# Altium PCB PCI_ASTROPIX_carrier.PcbDoc
Units mm, origin at the board's own origin, x right, y up, seen from the top; angles counter-clockwise.
Board outline 51.3 x 50.35 mm, 4 copper layers (Top Layer, HV_vss, vdd_gnd, Bottom Layer); 36 components, 76 nets, 434 pads, 16 vias.
Unrouted connection lines stored in the file: 94.
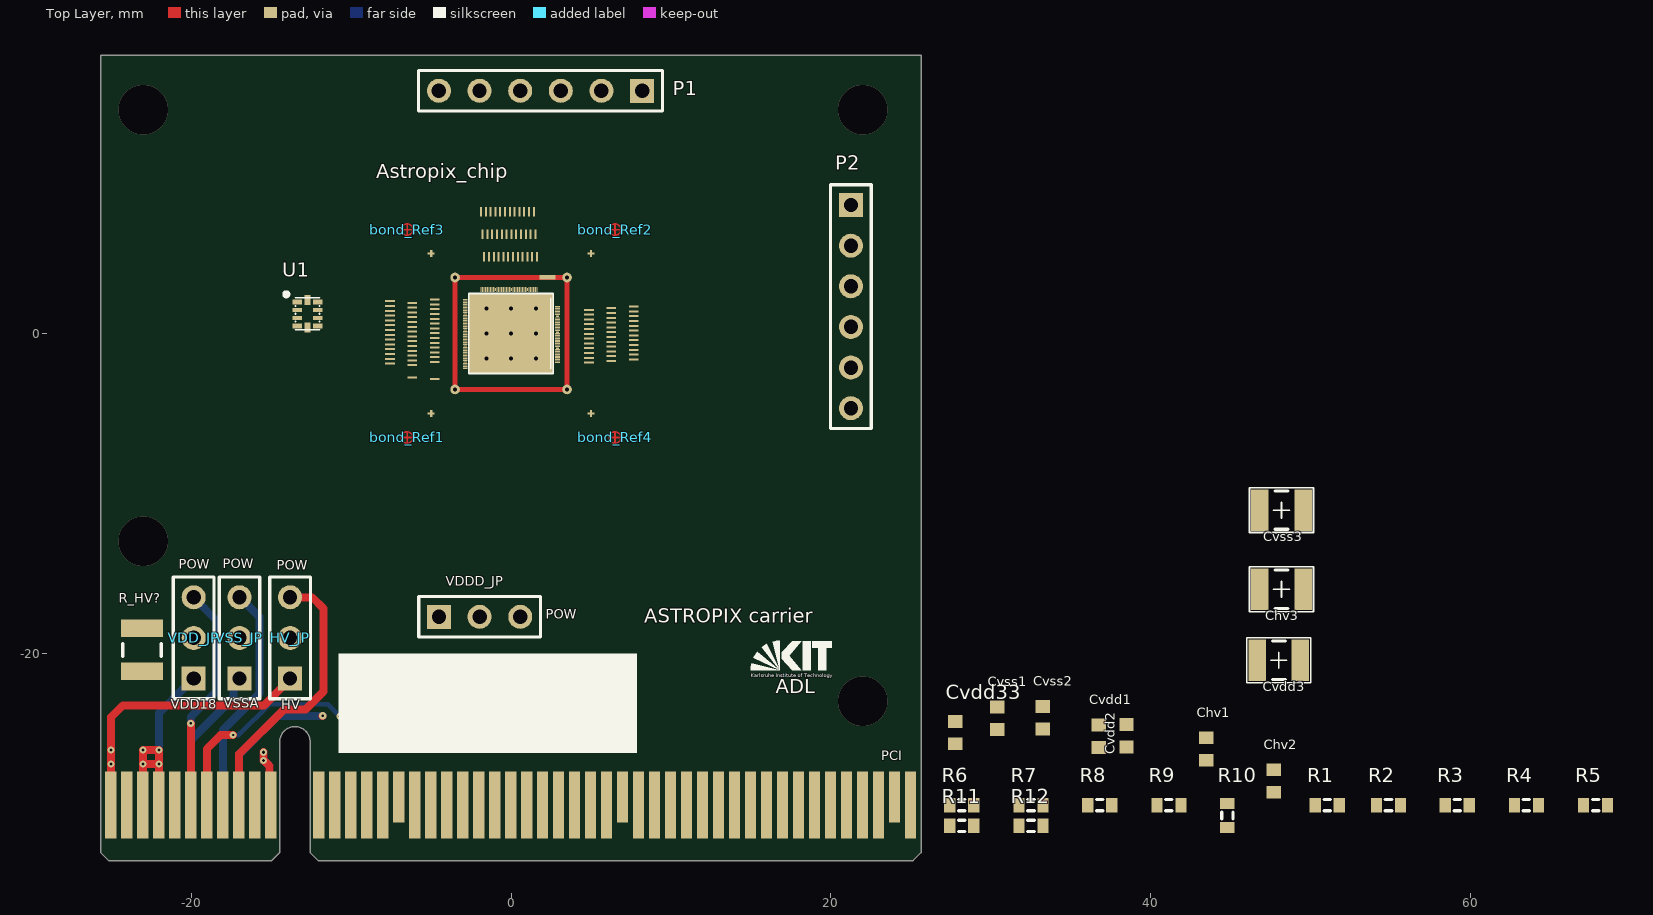
[diagram p0: Top Layer view]
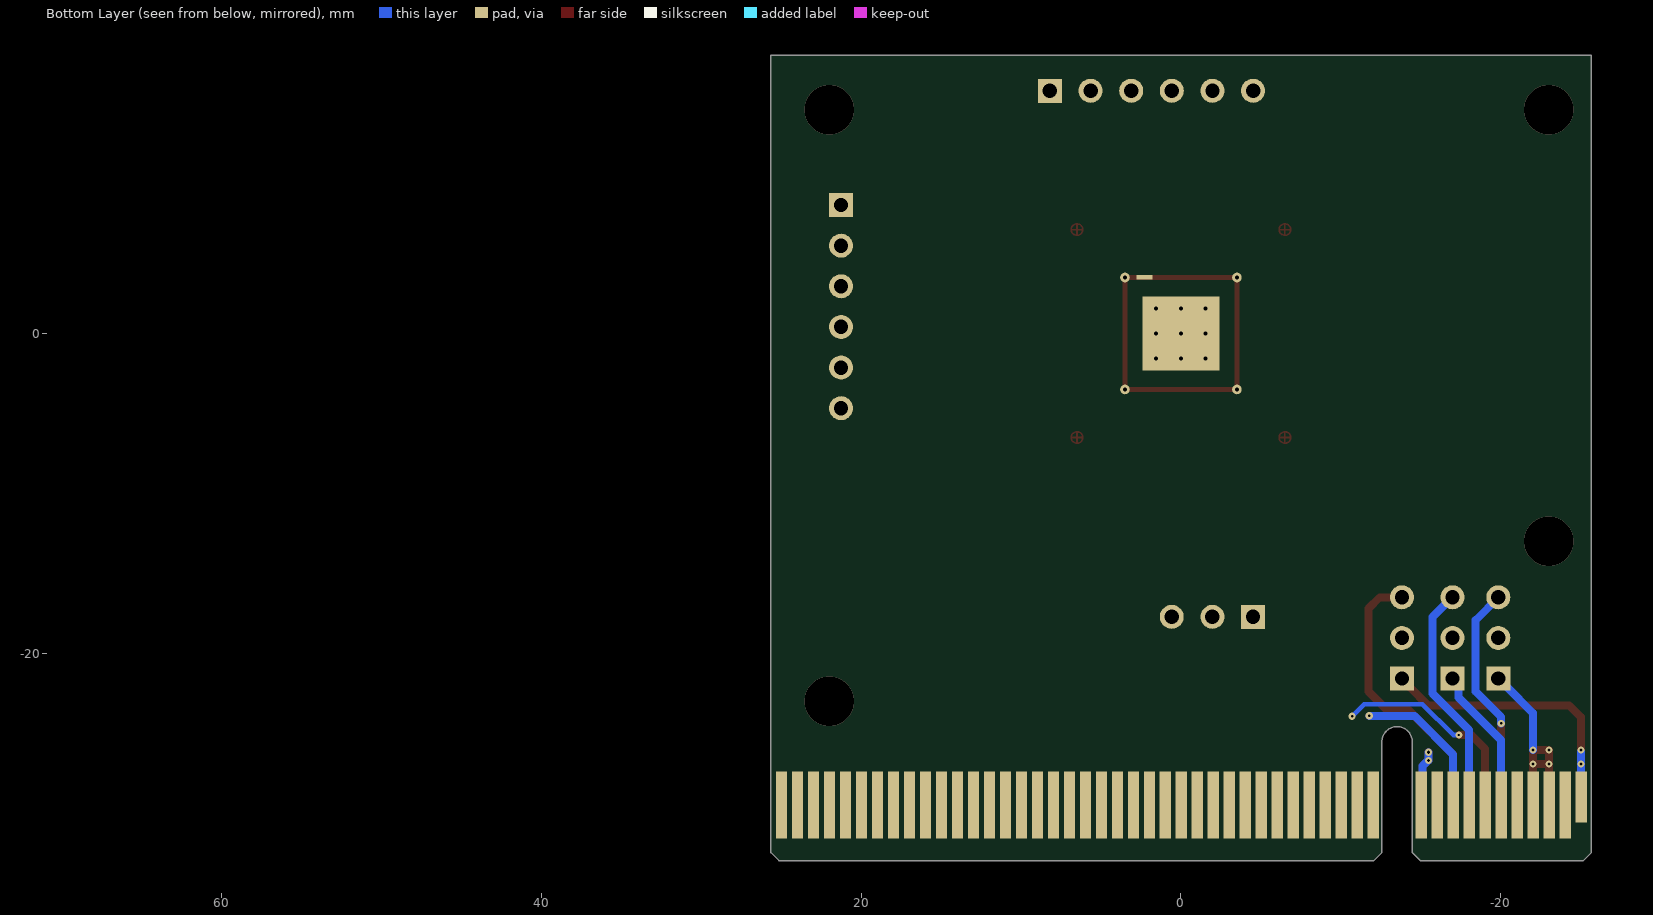
[diagram p1: Bottom Layer view, seen from below]
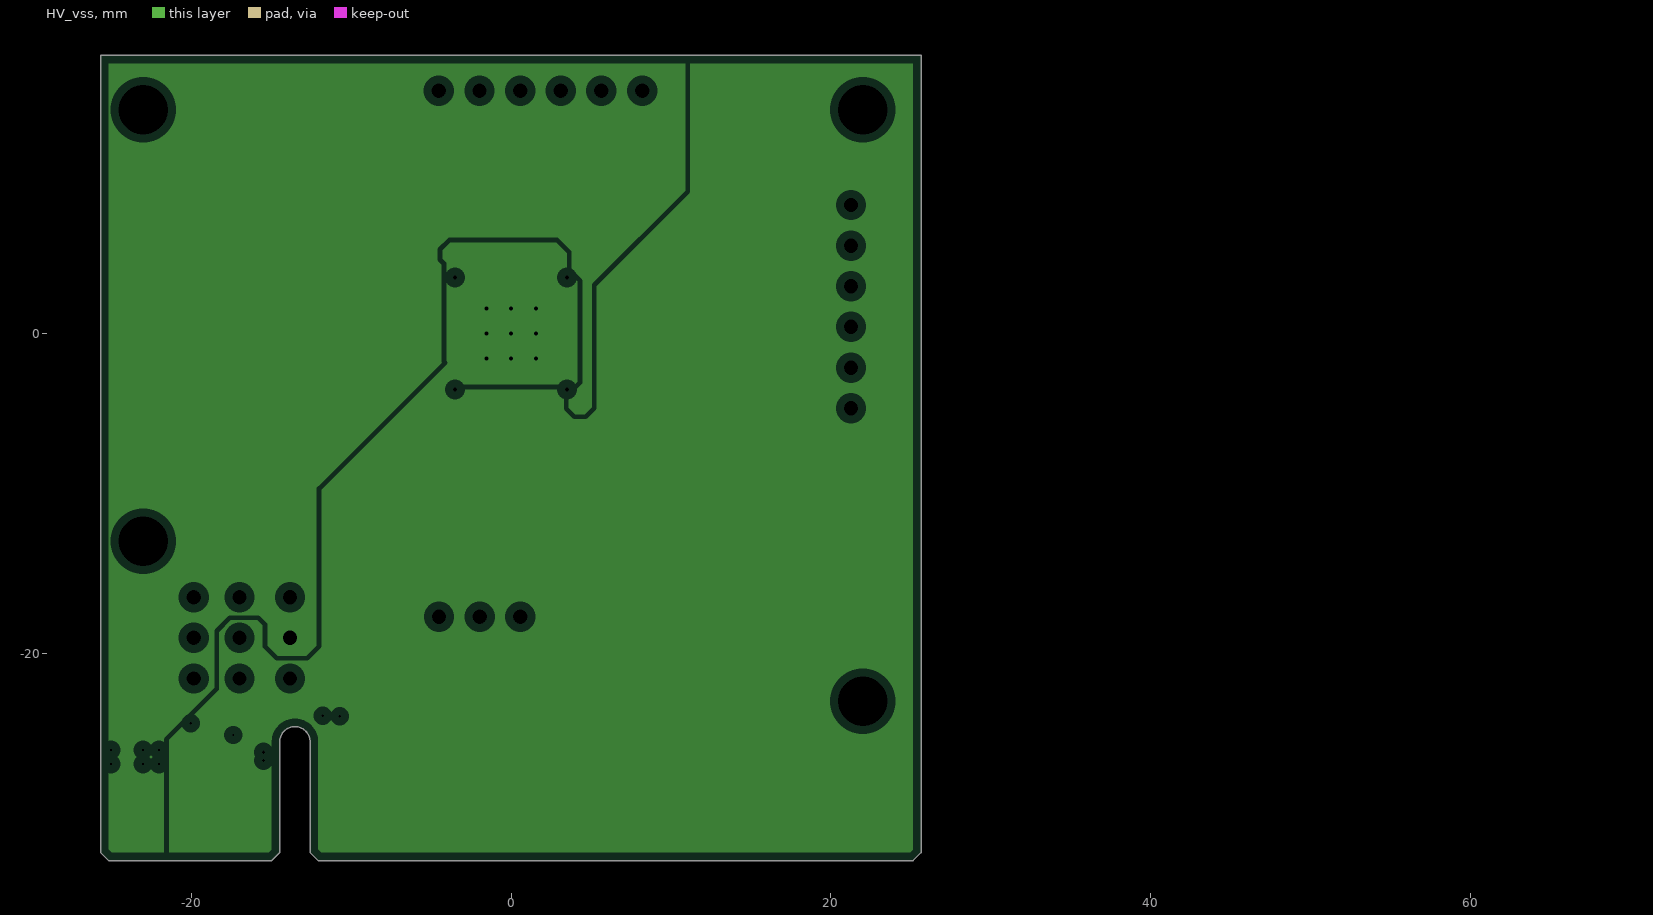
[diagram p2: HV_vss, clearances drawn from the general rule]
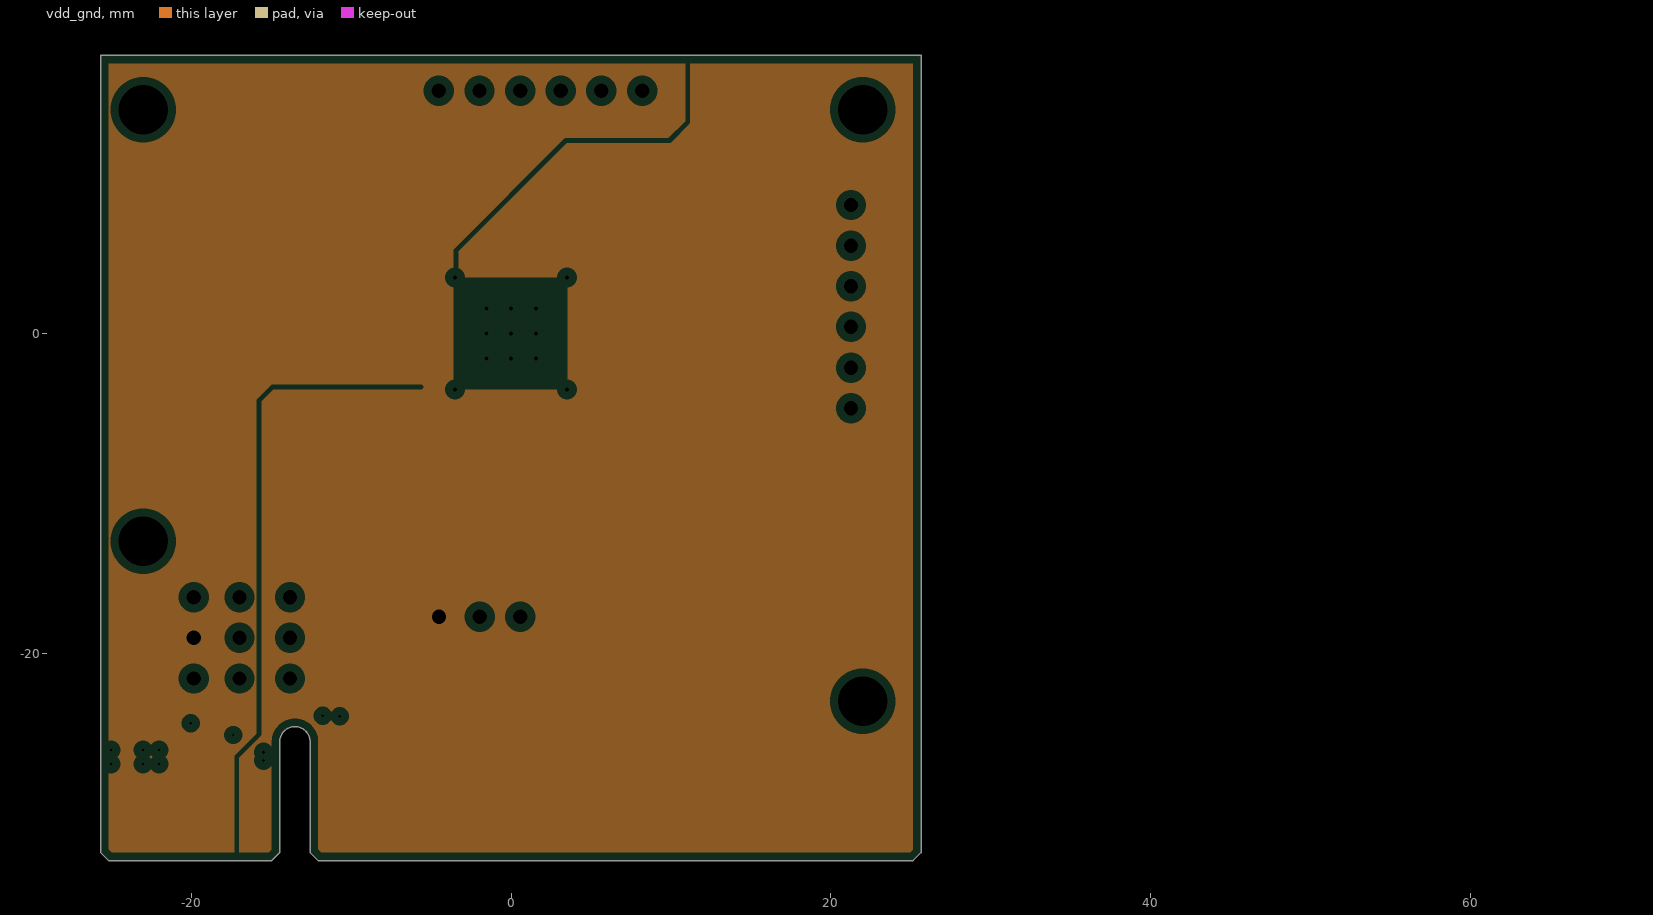
[diagram p3: vdd_gnd, clearances drawn from the general rule]

## Layer stack, top to bottom
Top Solder: solder mask 0.0102, Solder Resist, Dk 3.5
Top Layer: signal copper 0.0356
Dielectric 1: dielectric 0.32, FR-4, Dk 4.8
HV_vss: plane copper 0.0356, net sub_board
Dielectric2: dielectric 0.32, FR-4, Dk 4.8
vdd_gnd: plane copper 0.0356, net vdd_board
Dielectric3: dielectric 0.32, FR-4, Dk 4.8
Bottom Layer: signal copper 0.0356
Bottom Solder: solder mask 0.0102, Solder Resist, Dk 3.5

## Board outline
-25.665,-32.456 -25.165,-32.956 -14.965,-32.956 -14.465,-32.456 -14.465,-25.527 cw(c-13.515,-25.527) -12.565,-25.527 -12.565,-32.456 -12.065,-32.956 25.135,-32.956 25.635,-32.456 25.635,-20.206 25.635,17.399 -25.665,17.399 -25.665,-22.031

## Design rules (kind name [scope] priority, off if disabled: settings)
Clearance Clearance_1 [All] p1: gap=0.125 ignorepadtopadclearanceinfootprint=FALSE except(0.17: SMDPad-SMDPad SMDPad-THPad SMDPad-Via THPad-THPad THPad-Via Via-Via)
Clearance [All] p2: gap=0.125 ignorepadtopadclearanceinfootprint=FALSE except(0: Arc-Fill Arc-Poly Arc-Region Track-Fill Track-Poly Track-Region SMDPad-Fill SMDPad-Poly SMDPad-Region THPad-Fill THPad-Poly THPad-Region Via-Fill Via-Poly Via-Region Fill-Fill Fill-Poly Fill-Region Poly-Poly Poly-Region Region-Region; 0.17: SMDPad-SMDPad SMDPad-THPad SMDPad-Via THPad-THPad THPad-Via Via-Via)
ComponentClearance [All] p1: gap=0 collisioncheckmode=3 verticalgap=0 showdistances=FALSE
DiffPairsRouting [InDifferentialPairClass('Horacios')] p1: maxlimit=0.15 minlimit=0.125 mostfreqgap=0.125 toplayer_minwidth=0.1 toplayer_maxwidth=0.15 toplayer_prefwidth=0.1 bottomlayer_minwidth=0.1 bottomlayer_maxwidth=0.15 bottomlayer_prefwidth=0.1 maxuncoupledlength=0.5
FabricationTestPointUsage FabricationTestPointUsage_1 [All] p1: valid=0 allowmultiple=FALSE
FabricationTestpoint FabricationTestpoint_1 [All] p1: side=3 testpointundercomponent=TRUE minsize=1.016 maxsize=2.54 preferedsize=1.524 minholesize=0 maxholesize=1.016 preferedholesize=0.813 testpointgrid=0.025 allowsidetop=TRUE allowsidebottom=TRUE usegrid=TRUE gridtolerance=0
HoleSize [All] p1: absolutevalues=TRUE maxlimit=6 minlimit=0.3 maxpercent=80.000 minpercent=20.000
HoleSize FabricationTestpoint [All] p2 off: absolutevalues=TRUE maxlimit=2.54 minlimit=0.025 maxpercent=80.000 minpercent=20.000
HoleSize FabricationTestPointUsage [All] p3 off: absolutevalues=TRUE maxlimit=2.54 minlimit=0.025 maxpercent=80.000 minpercent=20.000
MatchedLengths MatchedLengths_Within_diff [All] p1: tolerance=0.02 checknetsindiffpair=TRUE checkdiffpairvsdiffpair=FALSE checkxsignals=FALSE checkothers=FALSE
MatchedLengths MatchedLengths_all_diff [InDifferentialPairClass('FMC_LAxx')] p2: tolerance=0.1 checknetsindiffpair=FALSE checkdiffpairvsdiffpair=TRUE checkxsignals=TRUE checkothers=TRUE
MinimumAnnularRing [All] p1: minimumring=0.254
PlaneClearance [All] p1: clearance=0.5
PlaneConnect [All] p1: planeconnectstyle=Relief reliefexpansion=0.4 reliefentries=4 reliefconductorwidth=0.15 reliefairgap=0.15
PolygonConnect [All] p1: connectstyle=Relief reliefconductorwidth=0.15 reliefentries=4 polygonreliefangle="90 Angle" airgapwidth=0.254
RoomDefinition PCI_ASTROPIX_carrier [InComponentClass('PCI_ASTROPIX_carrier')] p1: confinementstyle=ConfineIn formatcopy=TRUE lockcomponents=FALSE outline 26.779,-31.537 97.382,-31.537 97.382,-23.636 26.779,-23.636
RoutingCorners [All] p1: cornerstyle=45-Degree minsetback=1.25 maxsetback=1.25
RoutingVias [All] p1: holewidth=0.15 width=0.3 viastyle="Through Hole" minholewidth=0.15 minwidth=0.3 maxholewidth=0.45 maxwidth=0.75
SilkToSilkClearance [All] p1 off: silktosilkclearance=0.254
SolderMaskExpansion [All] p1: expansion=0.075 istentingtop=FALSE
Width Width_Power [InNetClass('Analog')] p1: maxlimit=10 minlimit=0.125 preferedwidth=0.25 minimp=50.000000 maximp=50.000000 favimp=50.000000
Width [All] p2: maxlimit=0.254 minlimit=0.125 preferedwidth=0.125 minimp=50.000000 maximp=50.000000 favimp=50.000000
21 further rules are at their usual default settings.

## Components (designator, comment, footprint, x,y, rotation, side; value= is the part's Value field where it differs from the comment)
Astropix_chip "AstroPix_chip_full" "Astropix_Chip_w_bondpads_1mm_distance_125u - duplicate - duplicate" 0,0 r270 top locked
bond_Ref1 "AimStar" AimStar -6.5,-6.5 r90 top locked
bond_Ref2 "AimStar" AimStar 6.5,6.5 r90 top locked
bond_Ref3 "AimStar" AimStar -6.5,6.5 r90 top locked
bond_Ref4 "AimStar" AimStar 6.5,-6.5 r90 top locked
Chv1 "Cap Semi" 1608[0603] 43.475,-25.975 r90 top value=100pF
Chv2 "Cap Semi" 1608[0603] 47.675,-27.975 r90 top value=100pF
Chv3 "Cap Semi" C1210 48.166,-15.992 r0 top value=100pF
Cvdd1 "Cap Semi" 1608[0603] 36.75,-25.175 r90 top value=100pF
Cvdd2 "Cap Semi" 1608[0603] 38.475,-25.15 r90 top value=100pF
Cvdd3 "Cap Semi" C1210 48,-20.425 r0 top value=100pF
Cvdd33 "Cap Semi" 1608[0603] 27.775,-24.95 r90 top value=100nF
Cvss1 "Cap Semi" 1608[0603] 30.4,-24.05 r90 top value=100pF
Cvss2 "Cap Semi" 1608[0603] 33.25,-24.025 r90 top value=100pF
Cvss3 "Cap Semi" C1210 48.166,-11.039 r0 top value=100pF
HV_JP "Header 3" HDR1X3 -13.818,-21.572 r90 top
P1 "Header 6" HDR1X6 8.19,15.175 r180 top
P2 "Header 6" HDR1X6 21.25,8.03 r270 top
PCI "PCI_custom_98_GECCO" PCI_for_PCB_98 -1.011,-29.094 r0 top
R1 "Res3" J1-0603 51.03,-29.487 r0 top value=10K
R2 "Res3" J1-0603 54.855,-29.487 r0 top value=10K
R3 "Res3" J1-0603 59.155,-29.487 r0 top value=10K
R4 "Res3" J1-0603 63.48,-29.487 r0 top value=10K
R5 "Res3" J1-0603 67.806,-29.487 r0 top value=10K
R6 "Res3" J1-0603 28.179,-29.487 r0 top value=10K
R7 "Res3" J1-0603 32.504,-29.487 r0 top value=10K
R8 "Res3" J1-0603 36.804,-29.487 r0 top value=10K
R9 "Res3" J1-0603 41.129,-29.487 r0 top value=10K
R10 "Res3" J1-0603 44.78,-30.137 r90 top value=10K
R11 "Res3" J1-0603 28.179,-30.787 r0 top value=10K
R12 "Res3" J1-0603 32.504,-30.787 r0 top value=10K
R_HV? "Res3" 14-1210 -23.075,-19.775 r90 top value=1K
U1 "SN65LVDS4" SN65LVDS4RSER -12.725,1.225 r270 top
VDD_JP "Header 3" HDR1X3 -19.844,-21.572 r90 top
VDDD_JP "Header 3" HDR1X3 -4.505,-17.714 r0 top
VSS_JP "Header 3" HDR1X3 -16.979,-21.572 r90 top

## Footprints (in the part's own frame and the unit in brackets; to place one, negate y for a bottom-side part, rotate by r counter-clockwise, add the part's x,y. Pads: shape width x height; smd on the part's side, far side on the other; paste and mask are expansions set on the pad)
14-1210 [mm] "Chip Resistor, Body 3.2x2.5mm, IPC High Density"
  rect 1.1x2.6 smd: 1(-1.35,0) 2(1.35,0)
  silkscreen extent -0.4,-1.2 0.4,1.2, body extent -1.68,-1.32 1.68,1.32, height 0.9
1608[0603] [mm] "Chip Capacitor, Body 1.6x0.8mm, IPC High Density"
  rect 0.8x0.9 smd: 1(-0.7,0) 2(0.7,0)
  body extent -0.87,-0.48 0.87,0.48, height 1.3
AimStar [mm]
  Top Layer circle w0.1: c-0.004,0 r0.36
  Top Layer lines w0.1: -0.004,0.35 0,-0.35 ; -0.35,0 0.35,0
"Astropix_Chip_w_bondpads_1mm_distance_125u - duplicate - duplicate" [mm]
  rect 0.125x0.6 smd mask+0.075: 1(-2.12,-4.77) 2(-2.02,-7.57) 3(-1.92,-6.17) 4(-1.82,-4.77) 5(-1.72,-7.57) 6(-1.62,-6.17) 7(-1.52,-4.77) 8(-1.42,-7.57) 9(-1.32,-6.17) 10(-1.22,-4.77) 11(-1.12,-7.57) 12(-1.02,-6.17) 13(-0.92,-4.77) 14(-0.82,-7.57) 15(-0.72,-6.17) 16(-0.62,-4.77) 17(-0.52,-7.57) 18(-0.42,-6.17) 19(-0.32,-4.77) 20(-0.22,-7.57) 21(-0.12,-6.17) 22(-0.02,-4.77) 23(0.08,-7.57) 24(0.18,-6.17) 25(0.28,-4.77) 26(0.38,-7.57) 27(0.48,-6.17) 28(0.58,-4.77) 29(0.68,-7.57) 30(0.78,-6.17) 31(0.88,-4.77) 32(0.98,-7.57) 33(1.08,-6.17) 34(1.18,-4.77) 35(1.28,-7.57) 36(1.38,-6.17) 37(1.48,-4.77) 38(1.58,-7.57) 39(1.68,-6.17) 40(1.78,-4.77) 41(1.88,-7.57) 42(1.98,-6.17) 43(2.84,-4.77) 44(2.74,-6.17) 81(1.82,4.87) 82(1.72,6.27) 83(1.62,7.67) 84(1.52,4.87) 85(1.42,6.27) 86(1.32,7.67) 87(1.22,4.87) 88(1.12,6.27) 89(1.02,7.67) 90(0.92,4.87) 91(0.82,6.27) 92(0.72,7.67) 93(0.62,4.87) 94(0.52,6.27) 95(0.42,7.67) 96(0.32,4.87) 97(0.22,6.27) 98(0.12,7.67) 99(0.02,4.87) 100(-0.08,6.27) 101(-0.18,7.67) 102(-0.28,4.87) 103(-0.38,6.27) 104(-0.48,7.67) 105(-0.58,4.87) 106(-0.68,6.27) 107(-0.78,7.67) 108(-0.88,4.87) 109(-0.98,6.27) 110(-1.08,7.67) 111(-1.18,4.87) 112(-1.28,6.27) 113(-1.38,7.67) 114(-1.48,4.87) 115(-1.58,6.27) 116(-1.68,7.67)
  rect 0.3x1 all layers, no hole mask+0: 2(-3.51,2.27)
  round 0.6 hole 0.25: 2(3.5,3.5) 2(3.5,-3.5) 201(-1.55,1.55) 201(-1.55,0) 201(-1.55,-1.55) 201(0,1.55) 201(0,0) 201(0,-1.55) 201(1.55,1.55) 201(1.55,0) 201(1.55,-1.55) 202(-3.5,3.5) 202(-3.5,-3.5)
  rect 0.6x0.125 smd mask+0.075: 45(-7.6,-1.88) 46(-6.2,-1.78) 47(-4.8,-1.68) 48(-7.6,-1.58) 49(-6.2,-1.48) 50(-4.8,-1.38) 51(-7.6,-1.28) 52(-6.2,-1.18) 53(-4.8,-1.08) 54(-7.6,-0.98) 55(-6.2,-0.88) 56(-4.8,-0.78) 57(-7.6,-0.68) 58(-6.2,-0.58) 59(-4.8,-0.48) 60(-7.6,-0.38) 61(-6.2,-0.28) 62(-4.8,-0.18) 63(-7.6,-0.08) 64(-6.2,0.02) 65(-4.8,0.12) 66(-7.6,0.22) 67(-6.2,0.32) 68(-4.8,0.42) 69(-7.6,0.52) 70(-6.2,0.62) 71(-4.8,0.72) 72(-7.6,0.82) 73(-6.2,0.92) 74(-4.8,1.02) 75(-7.6,1.12) 76(-6.2,1.22) 77(-4.8,1.32) 78(-7.6,1.42) 79(-6.2,1.52) 80(-4.8,1.62)
  rect 4.63x4.82 smd far side: 201(0,0)
  rect 5x5.28 smd: 201(0,0)
  rect 0.3x0.07 smd mask+0.015: NC(-2.75,-1.88) NC(-2.75,1.12) NC(-2.75,1.22) NC(-2.75,1.32) NC(-2.75,1.42) NC(-2.75,1.52) NC(-2.75,1.62) NC(-2.75,-0.88) NC(-2.75,-0.78) NC(-2.75,-0.68) NC(-2.75,-0.58) NC(-2.75,-0.48) NC(-2.75,-0.38) NC(-2.75,-0.28) NC(-2.75,-0.18) NC(-2.75,-0.08) NC(-2.75,0.12) NC(-2.75,0.22) NC(-2.75,0.32) NC(-2.75,0.42) NC(-2.75,0.52) NC(-2.75,0.62) NC(-2.75,0.72) NC(-2.75,0.82) NC(-2.75,0.92) NC(-2.75,-1.78) NC(-2.75,-1.68) NC(-2.75,-1.58) NC(-2.75,-1.48) NC(-2.75,-1.38) NC(-2.75,-1.28) NC(-2.75,-1.18) NC(-2.75,-1.08)
  rect 0.2x0.07 smd mask+0.015: NC(-2.75,1.02) NC(-2.75,-0.98) NC(-2.75,0.02)
  rect 0.07x0.3 smd mask+0.015: NC(-2.12,-2.86) NC(-2.02,-2.86) NC(-1.92,-2.86) NC(-1.82,-2.86) NC(-1.72,-2.86) NC(-1.68,2.9) NC(-1.62,-2.86) NC(-1.58,2.9) NC(-1.52,-2.86) NC(-1.48,2.9) NC(-1.42,-2.86) NC(-1.38,2.9) NC(-1.32,-2.86) NC(-1.28,2.9) NC(-1.18,2.9) NC(-1.12,-2.86) NC(-1.02,-2.86) NC(-0.98,2.9) NC(-0.92,-2.86) NC(-0.88,2.9) NC(-0.82,-2.86) NC(-0.78,2.9) NC(-0.72,-2.86) NC(-0.68,2.9) NC(-0.62,-2.86) NC(-0.58,2.9) NC(-0.52,-2.86) NC(-0.48,2.9) NC(-0.42,-2.86) NC(-0.38,2.9) NC(-0.32,-2.86) NC(-0.28,2.9) NC(-0.18,2.9) NC(-0.12,-2.86) NC(-0.02,-2.86) NC(0.02,2.9) NC(0.08,-2.86) NC(0.12,2.9) NC(0.18,-2.86) NC(0.22,2.9) NC(0.28,-2.86) NC(0.32,2.9) NC(0.38,-2.86) NC(0.42,2.9) NC(0.48,-2.86) NC(0.52,2.9) NC(0.58,-2.86) NC(0.62,2.9) NC(0.68,-2.86) NC(0.72,2.9) NC(0.82,2.9) NC(0.88,-2.86) NC(0.98,-2.86) NC(1.02,2.9) NC(1.08,-2.86) NC(1.12,2.9) NC(1.18,-2.86) NC(1.22,2.9) NC(1.28,-2.86) NC(1.32,2.9) NC(1.38,-2.86) NC(1.42,2.9) NC(1.48,-2.86) NC(1.52,2.9) NC(1.58,-2.86) NC(1.62,2.9) NC(1.68,-2.86) NC(1.72,2.9) NC(1.82,2.9) NC(1.88,-2.86) NC(1.98,-2.86) NC(2.08,-2.86) NC(2.18,-2.86)
  rect 0.07x0.2 smd mask+0.015: NC(-1.22,-2.86) NC(-1.08,2.9) NC(-0.22,-2.86) NC(-0.08,2.9) NC(0.78,-2.86) NC(0.92,2.9) NC(1.78,-2.86)
  rect 0.45x0.15 smd: p(-5,5) p(-5,-5) p(5,5) p(5,-5)
  rect 0.15x0.45 smd: p(-5,5) p(-5,-5) p(5,5) p(5,-5)
  Top Layer lines w0.3: 3.5,-3.5 -3.5,-3.5 -3.5,3.5 3.5,3.5 3.5,-3.5
  silkscreen extent -2.5,-2.64 2.5,2.64
C1210 [mm] "Chip Capacitor, Body 3.2x2.5mm, IPC High Density"
  rect 1.1x2.6 smd: 1(-1.35,0) 2(1.35,0)
  silkscreen extent -2,-1.4 2,1.4
HDR1X3 [mm] "Connector; Header; 3 Position"
  rect 1.5x1.5 hole 0.9: 1(0,0)
  round 1.5 hole 0.9: 2(2.54,0) 3(5.08,0)
  silkscreen extent -1.27,-1.27 6.35,1.27
HDR1X6 [mm] "Connector; Header; 6 Position"
  rect 1.5x1.5 hole 0.9: 1(0,0)
  round 1.5 hole 0.9: 2(2.54,0) 3(5.08,0) 4(7.62,0) 5(10.16,0) 6(12.7,0)
  silkscreen extent -1.27,-1.27 13.97,1.27
J1-0603 [mm] "Chip Resistor, Body 1.6x0.8mm, IPC High Density"
  rect 0.7x0.9 smd: 1(-0.75,0) 2(0.75,0)
  silkscreen extent -0.2,-0.35 0.2,0.35, body extent -0.85,-0.48 0.85,0.48, height 0.9
PCI_for_PCB_98 [mm]
  rect 0.7x3.2 smd far side: A1(-24.014,0.119)
  rect 0.7x4.2 smd far side: A2(-23.014,-0.381) A3(-22.014,-0.381) A4(-21.014,-0.381) A5(-20.014,-0.381) A6(-19.014,-0.381) A7(-18.014,-0.381) A8(-17.014,-0.381) A9(-16.014,-0.381) A10(-15.014,-0.381) A11(-14.014,-0.381) A12(-11.014,-0.381) A13(-10.014,-0.381) A14(-9.014,-0.381) A15(-8.014,-0.381) A16(-7.014,-0.381) A17(-6.014,-0.381) A18(-5.014,-0.381) A19(-4.014,-0.381) A20(-3.014,-0.381) A21(-2.014,-0.381) A22(-1.014,-0.381) A23(-0.014,-0.381) A24(0.986,-0.381) A25(1.986,-0.381) A26(2.986,-0.381) A27(3.986,-0.381) A28(4.986,-0.381) A29(5.986,-0.381) A30(6.986,-0.381) A31(7.986,-0.381) A32(8.986,-0.381) A33(9.986,-0.381) A34(10.986,-0.381) A35(11.986,-0.381) A36(12.986,-0.381) A37(13.986,-0.381) A38(14.986,-0.381) A39(15.986,-0.381) A40(16.986,-0.381) A41(17.986,-0.381) A42(18.986,-0.381) A43(19.986,-0.381) A44(20.986,-0.381) A45(21.986,-0.381) A46(22.986,-0.381) A47(23.986,-0.381) A48(24.986,-0.381) A49(25.986,-0.381)
  rect 0.7x4.2 smd: B1(-24.014,-0.381) B2(-23.014,-0.381) B3(-22.014,-0.381) B4(-21.014,-0.381) B5(-20.014,-0.381) B6(-19.014,-0.381) B7(-18.014,-0.381) B8(-17.014,-0.381) B9(-16.014,-0.381) B10(-15.014,-0.381) B11(-14.014,-0.381) B12(-11.014,-0.381) B13(-10.014,-0.381) B14(-9.014,-0.381) B15(-8.014,-0.381) B16(-7.014,-0.381) B18(-5.014,-0.381) B19(-4.014,-0.381) B20(-3.014,-0.381) B21(-2.014,-0.381) B22(-1.014,-0.381) B23(-0.014,-0.381) B24(0.986,-0.381) B25(1.986,-0.381) B26(2.986,-0.381) B27(3.986,-0.381) B28(4.986,-0.381) B29(5.986,-0.381) B30(6.986,-0.381) B32(8.986,-0.381) B33(9.986,-0.381) B34(10.986,-0.381) B35(11.986,-0.381) B36(12.986,-0.381) B37(13.986,-0.381) B38(14.986,-0.381) B39(15.986,-0.381) B40(16.986,-0.381) B41(17.986,-0.381) B42(18.986,-0.381) B43(19.986,-0.381) B44(20.986,-0.381) B45(21.986,-0.381) B46(22.986,-0.381) B47(23.986,-0.381) B49(25.986,-0.381)
  rect 0.7x3.2 smd: B17(-6.014,0.119) B31(7.986,0.119) B48(24.986,0.119)
SN65LVDS4RSER [mm] "SN65LVDS4  1.8-V High-Speed  Differential  Line Receiver"
  rect 0.3x0.58 smd mask+0.05: 1(-0.75,-0.635) 4(0.75,-0.635) 6(0.75,0.635) 9(-0.75,0.635)
  rect 0.25x0.58 smd mask+0.05: 2(-0.25,-0.635) 3(0.25,-0.635) 7(0.25,0.635) 8(-0.25,0.635)
  rect 0.63x0.35 smd mask+0.05: 5(0.86,0) 10(-0.86,0)
  silkscreen extent -1.35,-1.45 1,0.75

## Part data
Chv1 Chv2 Chv3 Cvdd1 Cvdd2 Cvdd3 Cvdd33 Cvss1 Cvss2 Cvss3: "Capacitor (Semiconductor SIM Model)", LatestRevisionDate=29-May-2009, LatestRevisionNote="IPC-7351 Footprint Added.", PackageDescription="Chip Capacitor", PackageReference=C1206, Published=8-Jun-2000, Publisher="Altium Limited"
HV_JP VDD_JP VDDD_JP VSS_JP: "Header, 3-Pin", LatestRevisionDate=17-Jul-2002, LatestRevisionNote="Re-released for DXP Platform.", Publisher="Altium Limited"
P1 P2: "Header, 6-Pin", LatestRevisionDate=17-Jul-2002, LatestRevisionNote="Re-released for DXP Platform.", Publisher="Altium Limited"
R1 R2 R3 R4 R5 R6 R7 R8 R9 R10 R11 R12 R_HV?: "Resistor", LatestRevisionDate=29-May-2009, LatestRevisionNote="IPC-7351 Footprint Added.", PackageDescription="Chip Resistor", PackageReference=J1-0603, Published=8-Jun-2000, Publisher="Altium Limited"
U1: "1.8-V High-Speed  Differential  Line Receiver"

## Via types
v1: diameter 0.45, hole 0.2, Top Layer to Bottom Layer, 8 vias
v2: diameter 3.1, hole 3.1, Top Layer to Bottom Layer, 4 vias
v3: diameter 0.45, hole 0.15, Top Layer to Bottom Layer, 4 vias

## Nets (pads, with @x,y where several pads share a name; then routed paths per layer and width w, separated by ;. In a path a pad name is that pad's centre, name@x,y a point inside that pad or via, vN(x,y) a via of type N, cw(c..) or ccw(c..) an arc to the next point about the centre after c; other vN are vias at no path point)
DAC_blpix: Astropix_chip.29 PCI.B12
DAC_VCasc2: Astropix_chip.35 PCI.B13
DAC_Vminuspix: Astropix_chip.37 PCI.B15
DAC_Vth: Astropix_chip.36 PCI.B14
FMC_LA07_N: PCI.A49
FMC_LA07_P: PCI.A48
FMC_LA08_N: PCI.B49
FMC_LA08_P: PCI.B48
FMC_LA09_N: PCI.A47
FMC_LA09_P: PCI.A46
FMC_LA10_N: PCI.B47
FMC_LA10_P: PCI.B46
FMC_LA11_N: PCI.A45
FMC_LA11_P: PCI.A44
FMC_LA12_N: PCI.B45
FMC_LA12_P: PCI.B44
FMC_LA13_N: PCI.A43
FMC_LA13_P: PCI.A42
FMC_LA14_N: PCI.B43
FMC_LA14_P: PCI.B42
FMC_LA15_N: PCI.A41
FMC_LA15_P: PCI.A40
FMC_LA16_N: PCI.B41 U1.3
FMC_LA16_P: PCI.B40 U1.2
FMC_LA17_N: PCI.A23
FMC_LA17_P: PCI.A22
FMC_LA18_N: PCI.B23
FMC_LA18_P: PCI.B22
FMC_LA19_N: PCI.A21
FMC_LA19_P: PCI.A20
FMC_LA20_N: Astropix_chip.13 PCI.B21
FMC_LA20_P: Astropix_chip.12 PCI.B20 R12.1
FMC_LA21_N: PCI.A19
FMC_LA21_P: PCI.A18
FMC_LA22_N: Astropix_chip.11 PCI.B19
FMC_LA22_P: Astropix_chip.10 PCI.B18
FMC_LA23_N: PCI.A17
FMC_LA23_P: PCI.A16
FMC_LA24_N: PCI.B17
FMC_LA24_P: PCI.B16
gnd: Astropix_chip.202 Chv1.1 Chv2.1 Chv3.1 Cvdd1.1 Cvdd2.1 Cvdd3.1 Cvdd33.1 Cvss1.1 Cvss2.1 Cvss3.1 P1.6 P2.6 PCI.A11 PCI.B11 | length 6.7
  Top Layer w0.5: v1(-15.475,-26.175) v1(-15.475,-26.7) -15.45,-26.7 -15.11,-27.04 PCI.B11@-15.11,-29.361
  Bottom Layer w0.5: v1@-15.475,-26.2 v1(-15.475,-26.7) -15.45,-26.7 -15.11,-27.04 PCI.A11@-15.11,-29.361
GNDA: Astropix_chip.2 Astropix_chip.20 Astropix_chip.21 Astropix_chip.22 Astropix_chip.24 Astropix_chip.27 Astropix_chip.32 Astropix_chip.38 Astropix_chip.40 Astropix_chip.42 U1.1 U1.7
HV: HV_JP.1 PCI.A1 PCI.B1 | length 20.6
  Top Layer w0.5: PCI.B1@-25.015,-29.456 v1(-25.015,-26.916) v1@-25.015,-25.952 ; v1(-25.015,-26.035) -25.015,-23.99 -24.275,-23.25 -15.45,-23.25 -14.318,-22.118 -14.318,-22.072 -13.846,-21.6 HV_JP.1@-13.8,-21.6
  Bottom Layer w0.5: v1@-25.019,-26.916 v1@-25.019,-26.162 ; PCI.A1@-25.015,-28.956 v1(-25.015,-26.916)
Inj: Astropix_chip.34 PCI.B24
interrupt: Astropix_chip.6 R11.1
NetAstropix_chip_71: Astropix_chip.71 P1.5 R5.1
NetAstropix_chip_73: Astropix_chip.73 P1.4 R4.1
NetAstropix_chip_75: Astropix_chip.75 P1.3 R3.1
NetAstropix_chip_77: Astropix_chip.77 P1.2 R2.1
NetAstropix_chip_79: Astropix_chip.79 P1.1 R1.1
NetAstropix_chip_108: Astropix_chip.108 P2.5 R10.1
NetAstropix_chip_110: Astropix_chip.110 P2.4 R9.1
NetAstropix_chip_112: Astropix_chip.112 P2.3 R8.1
NetAstropix_chip_114: Astropix_chip.114 P2.2 R7.1
NetAstropix_chip_116: Astropix_chip.116 P2.1 R6.1
POW4: PCI.B5 PCI.B6 VDD_JP.3 | length 14.2
  Top Layer w0.5: PCI.B6@-20.025,-29.446 v3(-20.025,-24.375)
  Bottom Layer w0.5: v3(-20.025,-24.375) -20.025,-23.975 -18.425,-22.375 -18.425,-17.925 VDD_JP.3@-19.875,-16.475
POW5: PCI.A7 PCI.A8 VSS_JP.3 | length 14.5
  Bottom Layer w0.5: PCI.A8@-18.015,-29.456 -18.015,-24.79 -15.725,-22.5 -15.725,-17.725 VSS_JP.3@-17,-16.45
POW6: PCI.B7 PCI.B8 VDDD_JP.3 | length 13.3
  Top Layer w0.3: v3@-10.7,-23.95 v3(-10.7,-23.925)
  Top Layer w0.5: PCI.B7@-19.015,-29.456 -19.015,-25.965 -18.15,-25.1 v3(-17.375,-25.1)
  Bottom Layer w0.3: v3(-17.375,-25.1) -17.025,-25.1 -15.1,-23.175 -11.45,-23.175 v3(-10.7,-23.925)
POW7: PCI.A9 PCI.A10 | length 9.4
  Bottom Layer w0.5: PCI.A9@-17.015,-29.456 -17.015,-26.315 -14.6,-23.9 v3(-11.775,-23.9)
POW8: HV_JP.3 PCI.B9 PCI.B10 | length 17.6
  Top Layer w0.5: PCI.B9@-17,-29.45 -17,-26.3 -14.2,-23.5 -12.85,-23.5 -11.725,-22.375 -11.725,-17.2 -12.433,-16.492 HV_JP.3
res_n: Astropix_chip.7 Astropix_chip.9
SAMPLE_CLK: Astropix_chip.8 U1.8
SR_CK1: Astropix_chip.14 PCI.A29
SR_CK2: Astropix_chip.15 PCI.B29
SR_LOAD: Astropix_chip.16 PCI.B28
SR_RB: Astropix_chip.18
SR_SIN: Astropix_chip.17 PCI.A28
SR_SOUT: Astropix_chip.19
sub_board: Astropix_chip.43 Astropix_chip.44 Astropix_chip.201 Chv1.2 Chv2.2 Chv3.2 HV_JP.2
VDD18: PCI.B3 PCI.B4 R11.2 R12.2 VDD_JP.1 | length 14.2
  Top Layer w0.5: PCI.B3@-23.015,-29.456 v1(-23.015,-26.916) ; PCI.B4@-22.015,-29.456 v1(-22.015,-26.916) ; v1(-23.015,-26.916) v1(-22.015,-26.916) ; v1(-23.015,-26.916) v1(-23.015,-26.035) v1(-22.015,-26.035) v1(-22.015,-26.916)
  Bottom Layer w0.5: v1(-22.015,-26.035) -22.015,-23.74 -20.347,-22.072 -20.344,-22.072 -19.85,-21.578 VDD_JP.1@-19.85,-21.575
VDD33: PCI.A3 PCI.A4
vdd_board: Astropix_chip.3 Astropix_chip.25 Astropix_chip.28 Astropix_chip.33 Astropix_chip.39 Cvdd1.2 Cvdd2.2 Cvdd3.2 VDD_JP.2 VDDD_JP.1 | length 0.2
  Bottom Layer w0.5: VDD_JP.2@-20.017,-18.883 VDD_JP.2@-19.85,-19.05
VDDD: Astropix_chip.4 Astropix_chip.5 R1.2 R2.2 R3.2 R4.2 R5.2 R6.2 R7.2 R8.2 R9.2 R10.2 U1.10 VDDD_JP.2
vss_board: Cvss1.2 Cvss2.2 Cvss3.2
VSSA: PCI.A5 PCI.A6 VSS_JP.1 | length 9.2
  Bottom Layer w0.5: PCI.A6@-20.015,-29.456 -20.015,-25.415 -17.356,-22.756 -17.356,-21.956 VSS_JP.1@-16.95,-21.55
VSSA12: Astropix_chip.1 Astropix_chip.23 Astropix_chip.31 Astropix_chip.41 VSS_JP.2
pads on no net: Astropix_chip.26 Astropix_chip.30 Astropix_chip.45 Astropix_chip.46 Astropix_chip.47 Astropix_chip.48 Astropix_chip.49 Astropix_chip.50 Astropix_chip.51 Astropix_chip.52 Astropix_chip.53 Astropix_chip.54 Astropix_chip.55 Astropix_chip.56 Astropix_chip.57 Astropix_chip.58 Astropix_chip.59 Astropix_chip.60 Astropix_chip.61 Astropix_chip.62 Astropix_chip.63 Astropix_chip.64 Astropix_chip.65 Astropix_chip.66 Astropix_chip.67 Astropix_chip.68 Astropix_chip.69 Astropix_chip.70 Astropix_chip.72 Astropix_chip.74 Astropix_chip.76 Astropix_chip.78 Astropix_chip.80 Astropix_chip.81 Astropix_chip.82 Astropix_chip.83 Astropix_chip.84 Astropix_chip.85 Astropix_chip.86 Astropix_chip.87 Astropix_chip.88 Astropix_chip.89 Astropix_chip.90 Astropix_chip.91 Astropix_chip.92 Astropix_chip.93 Astropix_chip.94 Astropix_chip.95 Astropix_chip.96 Astropix_chip.97 Astropix_chip.98 Astropix_chip.99 Astropix_chip.100 Astropix_chip.101 Astropix_chip.102 Astropix_chip.103 Astropix_chip.104 Astropix_chip.105 Astropix_chip.106 Astropix_chip.107 Astropix_chip.109 Astropix_chip.111 Astropix_chip.113 Astropix_chip.115 Astropix_chip.NC Astropix_chip.p Cvdd33.2 PCI.A2 PCI.A12 PCI.A13 PCI.A14 PCI.A15 PCI.A24 PCI.A25 PCI.A26 PCI.A27 PCI.A30 PCI.A31 PCI.A32 PCI.A33 PCI.A34 PCI.A35 PCI.A36 PCI.A37 PCI.A38 PCI.A39 PCI.B2 PCI.B25 PCI.B26 PCI.B27 PCI.B30 PCI.B31 PCI.B32 PCI.B33 PCI.B34 PCI.B35 PCI.B36 PCI.B37 PCI.B38 PCI.B39 R_HV?.1 R_HV?.2 U1.4 U1.5 U1.6 U1.9
copper on no net:
  other v2: 22,-23 -23,-13 -23,14 22,14

## Polygon pours and split planes (outlines as drawn)
vdd_board on vdd_gnd (split plane): 25.125,-20.206 25.125,-32.245 24.924,-32.446 -11.854,-32.446 -12.055,-32.245 -12.055,-25.527 -12.055,-25.523 -12.064,-25.363 -12.091,-25.202 -12.137,-25.045 -12.199,-24.893 -12.279,-24.75 -12.373,-24.617 -12.482,-24.494 -12.605,-24.385 -12.738,-24.291 -12.881,-24.211 -13.033,-24.149 -13.19,-24.103 -13.352,-24.076 -13.515,-24.067 -13.679,-24.076 -13.84,-24.103 -13.997,-24.149 -14.149,-24.211 -14.292,-24.291 -14.425,-24.385 -14.548,-24.494 -14.657,-24.617 -14.751,-24.75 -14.831,-24.893 -14.893,-25.045 -14.939,-25.202 -14.966,-25.363 -14.975,-25.523 -14.975,-25.527 -14.975,-32.245 -15.176,-32.446 -16.999,-32.446 -16.999,-26.513 -15.643,-25.157 -15.619,-25.126 -15.604,-25.089 -15.599,-25.05 -15.599,-4.238 -14.862,-3.501 -5.625,-3.501 -5.586,-3.496 -5.549,-3.481 -5.518,-3.457 -5.494,-3.426 -5.479,-3.389 -5.474,-3.35 -5.479,-3.311 -5.494,-3.274 -5.518,-3.243 -5.549,-3.219 -5.586,-3.204 -5.625,-3.199 -14.925,-3.199 -14.964,-3.204 -15.001,-3.219 -15.032,-3.243 -15.857,-4.068 -15.881,-4.099 -15.887,-4.114 -15.896,-4.136 -15.901,-4.175 -15.901,-24.987 -17.257,-26.343 -17.281,-26.374 -17.296,-26.411 -17.301,-26.45 -17.301,-32.446 -24.954,-32.446 -25.155,-32.245 -25.155,-22.031 -25.155,16.889 10.898,16.889 10.898,13.271 9.843,12.216 3.429,12.216 3.39,12.211 3.353,12.196 3.322,12.172 -3.557,5.293 -3.581,5.262 -3.596,5.225 -3.601,5.186 -3.601,-3.35 -3.596,-3.389 -3.581,-3.426 -3.557,-3.457 -3.526,-3.481 -3.5,-3.492 -3.5,-3.5 -3.46,-3.5 -3.45,-3.501 -3.44,-3.5 3.5,-3.5 3.5,3.5 -3.299,3.5 -3.299,5.123 3.492,11.914 9.906,11.914 9.945,11.919 9.982,11.934 10.013,11.958 11.156,13.101 11.18,13.132 11.195,13.169 11.2,13.208 11.2,16.889 25.125,16.889
sub_board on HV_vss (split plane): 25.125,-20.206 25.125,-32.245 24.924,-32.446 -11.854,-32.446 -12.055,-32.245 -12.055,-25.527 -12.055,-25.523 -12.064,-25.363 -12.091,-25.202 -12.137,-25.045 -12.199,-24.893 -12.279,-24.75 -12.373,-24.617 -12.482,-24.494 -12.605,-24.385 -12.738,-24.291 -12.881,-24.211 -13.033,-24.149 -13.19,-24.103 -13.352,-24.076 -13.515,-24.067 -13.679,-24.076 -13.84,-24.103 -13.997,-24.149 -14.149,-24.211 -14.292,-24.291 -14.425,-24.385 -14.548,-24.494 -14.657,-24.617 -14.751,-24.75 -14.831,-24.893 -14.893,-25.045 -14.939,-25.202 -14.966,-25.363 -14.975,-25.523 -14.975,-25.527 -14.975,-32.245 -15.176,-32.446 -21.397,-32.446 -21.397,-25.435 -20.443,-24.482 -18.293,-22.332 -18.269,-22.301 -18.254,-22.264 -18.249,-22.225 -18.249,-18.663 -17.512,-17.926 -15.863,-17.926 -15.526,-18.263 -15.526,-19.575 -15.521,-19.614 -15.506,-19.651 -15.482,-19.682 -14.757,-20.407 -14.726,-20.431 -14.689,-20.446 -14.65,-20.451 -12.75,-20.451 -12.711,-20.446 -12.689,-20.437 -12.674,-20.431 -12.643,-20.407 -11.893,-19.657 -11.869,-19.626 -11.854,-19.589 -11.849,-19.55 -11.849,-9.763 -4.018,-1.932 -4.012,-1.925 -3.994,-1.901 -3.983,-1.875 -3.979,-1.864 -3.977,-1.849 -3.974,-1.825 -3.979,-1.786 -3.994,-1.749 -4.018,-1.718 -4.049,-1.687 -4.049,4.375 -4.054,4.414 -4.069,4.451 -4.093,4.482 -4.299,4.688 -4.299,5.187 -3.795,5.691 2.814,5.691 3.482,5.023 3.482,3.987 3.487,3.948 3.502,3.911 3.526,3.88 4.167,3.239 4.167,-2.994 3.343,-3.818 3.319,-3.849 3.304,-3.886 3.299,-3.925 3.299,-4.7 3.304,-4.739 3.319,-4.776 3.343,-4.807 3.843,-5.307 3.874,-5.331 3.911,-5.346 3.95,-5.351 4.675,-5.351 4.714,-5.346 4.736,-5.337 4.751,-5.331 4.782,-5.307 5.314,-4.775 5.338,-4.744 5.353,-4.707 5.358,-4.668 5.358,2.969 11.156,8.767 11.18,8.798 11.195,8.834 11.2,8.874 11.2,16.889 25.125,16.889
sub_board on HV_vss (split plane): 10.898,8.936 5.1,3.139 5.076,3.107 5.061,3.071 5.056,3.032 5.056,-4.605 4.612,-5.049 4.013,-5.049 3.601,-4.637 3.601,-3.988 4.425,-3.164 4.449,-3.133 4.464,-3.096 4.469,-3.057 4.469,3.302 4.464,3.341 4.453,3.367 4.449,3.378 4.425,3.409 3.784,4.05 3.784,5.086 3.779,5.125 3.764,5.161 3.74,5.193 2.984,5.949 2.952,5.973 2.916,5.988 2.877,5.993 -3.858,5.993 -3.897,5.988 -3.934,5.973 -3.965,5.949 -4.557,5.357 -4.581,5.326 -4.587,5.311 -4.596,5.289 -4.601,5.25 -4.601,4.625 -4.596,4.586 -4.587,4.564 -4.581,4.549 -4.557,4.518 -4.351,4.312 -4.351,-1.75 -4.346,-1.789 -4.334,-1.82 -12.107,-9.593 -12.131,-9.624 -12.142,-9.65 -12.146,-9.661 -12.151,-9.694 -12.151,-9.7 -12.151,-19.487 -12.813,-20.149 -14.587,-20.149 -15.224,-19.512 -15.224,-18.2 -15.229,-18.161 -15.244,-18.124 -15.268,-18.093 -15.693,-17.668 -15.724,-17.644 -15.739,-17.638 -15.761,-17.629 -15.8,-17.624 -17.575,-17.624 -17.614,-17.629 -17.636,-17.638 -17.651,-17.644 -17.682,-17.668 -18.507,-18.493 -18.531,-18.524 -18.546,-18.561 -18.551,-18.6 -18.551,-22.162 -20.657,-24.268 -21.655,-25.266 -21.679,-25.297 -21.694,-25.334 -21.699,-25.373 -21.699,-32.446 -24.954,-32.446 -25.155,-32.245 -25.155,-22.031 -25.155,16.889 10.898,16.889

## Other copper
HV_vss (plane layer: these items are gaps in the copper):
  rectangle: -3.5,-3.5 3.5,-3.2
  lines w0.3: -21.548,-33.02 -21.548,-25.373 -20.55,-24.375 -18.4,-22.225 -18.4,-18.6 -17.575,-17.775 -15.8,-17.775 -15.375,-18.2 -15.375,-19.575 -14.65,-20.3 -12.75,-20.3 -12,-19.55 -12,-9.7 -4.125,-1.825 -4.2,-1.75 -4.2,4.375 -4.45,4.625 -4.45,5.25 -3.858,5.842 2.877,5.842 3.633,5.086 3.633,3.987 4.318,3.302 4.318,-3.057 3.45,-3.925 3.45,-4.7 3.95,-5.2 4.675,-5.2 5.207,-4.668 5.207,3.032 11.049,8.874 11.049,17.399 ; -3.302,-32.956 -3.175,-32.829
vdd_gnd (plane layer: these items are gaps in the copper):
  rectangle: -3.5,-3.5 3.5,3.5
  lines w0.3: -21.971,-32.956 -17.15,-32.956 -17.15,-26.45 -15.75,-25.05 -15.75,-4.175 -14.925,-3.35 -5.625,-3.35 ; -3.45,-3.35 -3.45,5.186 3.429,12.065 9.906,12.065 11.049,13.208 11.049,17.399

## Silkscreen, mask and mechanical layers (free items; w line width, h text height)
Top Overlay:
  region: 15.034,-20.601 16.814,-21.044 14.98,-21.044 cw(c16.952,-21.061)
  region: 16.371,-19.264 16.814,-21.044 16.814,-19.21 ccw(c16.831,-21.182)
  region: 15.384,-19.895 16.814,-21.044 15.157,-20.258 cw(c16.862,-21.075)
  region: 16.001,-19.4 ccw(c16.785,-21) 15.661,-19.617 16.814,-21.044
  region: 19.194,-21.044 19.691,-21.044 19.691,-19.638 20.041,-19.638 20.041,-19.23 18.844,-19.23 18.844,-19.638 19.194,-19.638 19.194,-19.875
  region: 16.933,-20.337 17.591,-21.042 18.144,-21.042 17.406,-20.141 18.14,-19.229 17.57,-19.229 16.933,-19.932 16.933,-20.337
  region: 18.725,-19.23 18.227,-19.23 18.227,-21.042 18.725,-21.042
  region: 7.855,-26.213 -10.772,-26.213 -10.772,-20.012 7.855,-20.012
  text "POW" at -18.011,-14.904 h1
  text "POW" at -20.784,-14.93 h1
  text "POW" at -14.641,-14.981 h1
  text "POW" at 2.166,-18.049 h1
  text "ASTROPIX carrier" at 8.325,-18.4 h1.52
  text "Karlsruhe Institute of Technology" at 14.98,-21.591 h0.39
  text "ADL" at 16.546,-22.797 h1.52
  text "VSSA" at -17.958,-23.614 h1
  text "VDD18" at -21.276,-23.692 h1
  text "HV" at -14.368,-23.703 h1
Mechanical 1:
  lines w0.1: -14.465,-25.527 cw(c-13.515,-25.527) -12.565,-25.527 ; -14.465,-25.506 -14.465,-32.456 -14.965,-32.956 -25.165,-32.956 -25.665,-32.456 -25.665,-22.031 -25.665,17.399 25.635,17.399 ; -12.565,-25.506 -12.565,-32.456 -12.065,-32.956 25.135,-32.956 25.635,-32.456